# EAGLE board 3i v5 (EAGLE 9.7.0)
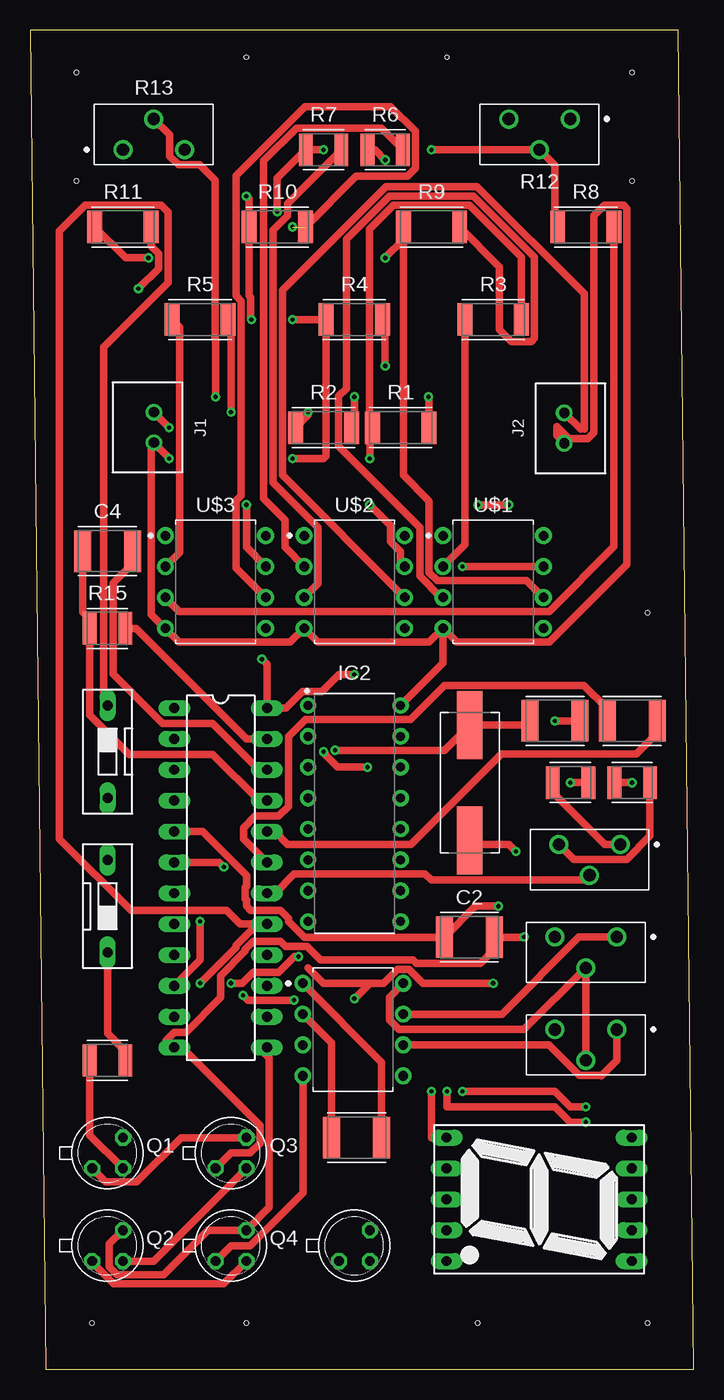
[diagram p0: board, top side]
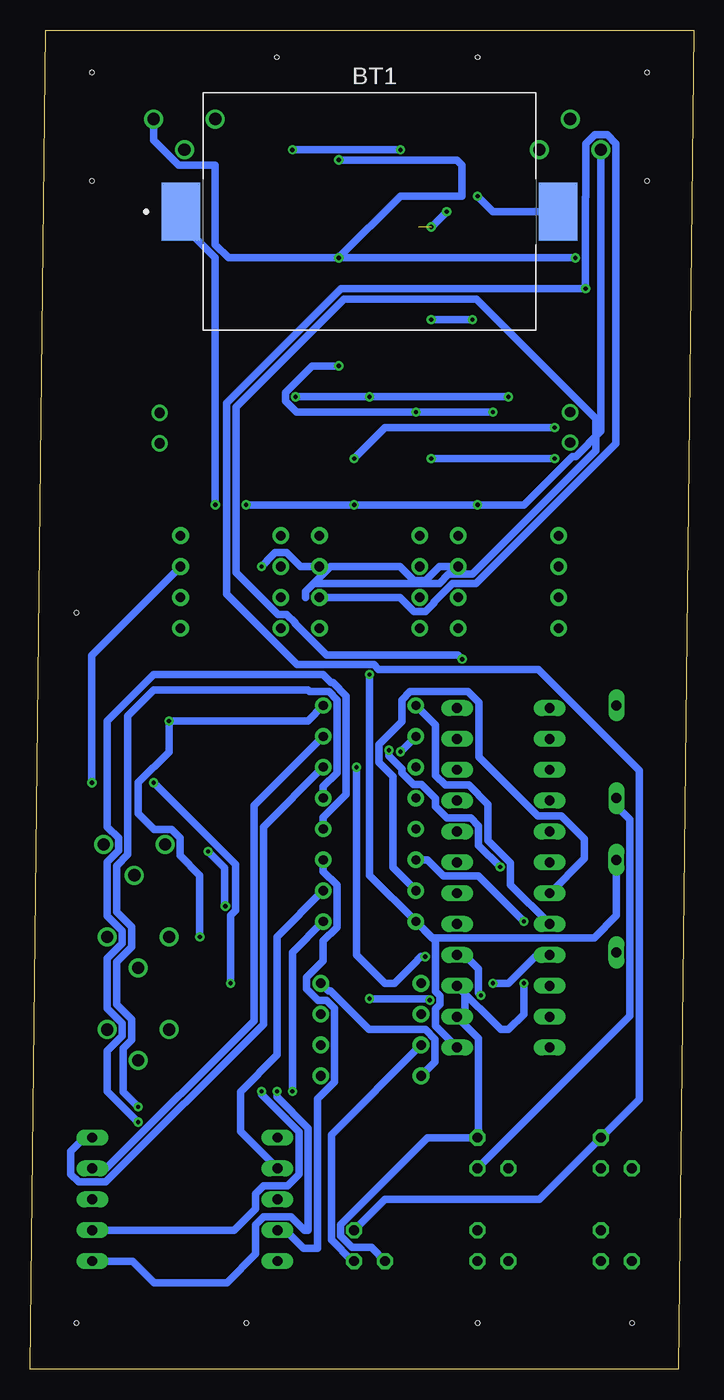
[diagram p1: board, bottom side, seen from below]

Size 54.59 x 110.16 mm. Coordinates in mm from the lower left corner, seen from the top.
Outline: 1.27,0 54.59,0 53.32,110.16 0,110.16 1.27,0
Copper layers (1*16): Top / Bottom
Stack-up Default Layer Stack: Top User Defined 0.035mm / Dielectric-1 User Defined 1.5mm / Bottom User Defined 0.035mm
Design rules: minimum copper width 6mil, minimum drill size 0.35mm, copper clearance wire_polygon to wire_polygon 6mil, copper clearance wire_polygon to pad_smd 6mil, copper clearance wire_polygon to via 6mil, copper clearance pad_smd to pad_smd 6mil, copper clearance pad_smd to via 6mil, copper clearance via to via 6mil, copper clearance smd to pad (same net) 6mil, copper clearance smd to via (same net) 6mil, copper clearance smd to smd (same net) 6mil, dimension clearance 40mil, via restrict clearance 0mil, restrict clearance 0mil, drill distance 6mil, keepout clearance 0mil
Holes 0.35 mm at 5.08,3.81 50.8,3.81 17.78,3.81 36.83,3.81 50.8,62.23 3.81,106.68 49.53,106.68 49.53,97.79 3.81,97.79 17.78,107.95 34.29,107.95

## Footprints (pad centres in the part's own frame; a part is rotated, then mirrored left to right if it is on the bottom)
796136-1 = smd 3.15 x 4.78: N 15.52,0; P -15.52,0
CAPC4532X135 = smd 1.397 x 3.415: 1 -2.057,0; 2 2.057,0
7SEG-13 = drill 0.813 long: 1 -5.08,-7.62; 2 -2.54,-7.62; 3 0,-7.62; 4 2.54,-7.62; 5 5.08,-7.62; 6 5.08,7.62; 7 2.54,7.62; 8 0,7.62; 9 -2.54,7.62; 10 -5.08,7.62
DIL24-3 = drill 0.813 long: 1 -13.97,-3.81; 2 -11.43,-3.81; 3 -8.89,-3.81; 4 -6.35,-3.81; 5 -3.81,-3.81; 6 -1.27,-3.81; 7 1.27,-3.81; 8 3.81,-3.81; 9 6.35,-3.81; 10 8.89,-3.81; 11 11.43,-3.81; 12 13.97,-3.81; 13 13.97,3.81; 14 11.43,3.81; 15 8.89,3.81; 16 6.35,3.81; 17 3.81,3.81; 18 1.27,3.81; 19 -1.27,3.81; 20 -3.81,3.81; 21 -6.35,3.81; 22 -8.89,3.81; 23 -11.43,3.81; 24 -13.97,3.81
DIP762W53P254L1969H508Q16B = drill 0.743 pad 1.343: 1 -3.81,8.89; 2 -3.81,6.35; 3 -3.81,3.81; 4 -3.81,1.27; 5 -3.81,-1.27; 6 -3.81,-3.81; 7 -3.81,-6.35; 8 -3.81,-8.89; 9 3.81,-8.89; 10 3.81,-6.35; 11 3.81,-3.81; 12 3.81,-1.27; 13 3.81,1.27; 14 3.81,3.81; 15 3.81,6.35; 16 3.81,8.89
DIP826W53P254L959H508Q8B = drill 0.786 pad 1.386: 1 -4.13,3.81; 2 -4.13,1.27; 3 -4.13,-1.27; 4 -4.13,-3.81; 5 4.13,-3.81; 6 4.13,-1.27; 7 4.13,1.27; 8 4.13,3.81
B2B-XH-A = drill 0.84: 1 0,0; 2 2.5,0
TO18 = drill 0.813 octagon: 1 -1.27,-1.27; 2 1.27,-1.27; 3 1.27,1.27
RESC5025X71 = smd 1.231 x 2.67: 1 -2.32,0; 2 2.32,0
RESC3224X71 = smd 1.131 x 2.66: 1 -1.47,0; 2 1.47,0
PV36Z = drill 1 pad 1.564: 1 0,0; 2 2.54,2.54; 3 5.08,0
DS-01 = drill 0.813 long: 1 0,-3.81; 2 0,3.81
XTAL1147X477X420N = smd 5.6 x 2.1: 1 -4.75,0; 2 4.75,0

## Placement (x,y rotation side)
BT1  796136-1  [796136-1]  26.67,95.25 0 bottom
C1  [CAPC4532X135]  49.53,53.34 0 top
C2  [CAPC4532X135]  36.14,35.54 0 top
C3  [CAPC4532X135]  43.18,53.34 0 top
C4  [CAPC4532X135]  6.35,67.31 0 top
C5  [CAPC4532X135]  26.86,19.05 0 top
DS1  7SEG-CK  [7SEG-13]  41.88,13.97 270 top
IC1  MAX132  [DIL24-3]  15.66,40.43 270 top
IC2  CD4511  [DIP762W53P254L1969H508Q16B]  26.67,45.72 0 top
IC3  IC-555  [DIP826W53P254L959H508Q8B]  26.56,27.94 0 top
J1  JST-XH-2PIN  [B2B-XH-A]  10.16,78.74 270 top
J2  JST-XH-2PIN  [B2B-XH-A]  43.95,76.18 90 top
Q1  NPN  [TO18]  6.35,17.78 0 top
Q2  NPN  [TO18]  6.35,10.16 0 top
Q3  NPN  [TO18]  16.51,17.78 0 top
Q4  NPN  [TO18]  16.51,10.16 0 top
Q5  NPN  [TO18]  26.67,10.16 0 top
R1  [RESC5025X71]  30.48,77.47 0 top
R2  [RESC5025X71]  24.13,77.47 0 top
R3  [RESC5025X71]  38.1,86.36 0 top
R4  [RESC5025X71]  26.67,86.36 0 top
R5  [RESC5025X71]  13.97,86.36 0 top
R6  [RESC3224X71]  29.21,100.33 0 top
R7  [RESC3224X71]  24.13,100.33 0 top
R8  [RESC5025X71]  45.72,93.98 0 top
R9  [RESC5025X71]  33.02,93.98 0 top
R10  [RESC5025X71]  20.32,93.98 0 top
R11  [RESC5025X71]  7.62,93.98 0 top
R12  [PV36Z]  44.45,102.87 180 top
R13  [PV36Z]  7.62,100.33 0 top
R14  [RESC3224X71]  44.45,48.26 0 top
R15  [RESC3224X71]  6.35,60.96 0 top
R16  [RESC3224X71]  49.53,48.26 0 top
R17  [PV36Z]  48.57,43.18 180 top
R18  [RESC3224X71]  6.35,25.4 0 top
R19  [PV36Z]  48.26,27.94 180 top
R20  [PV36Z]  48.26,35.56 180 top
S1  DS-01  [DS-01]  6.35,38.1 0 top
S2  DS-01  [DS-01]  6.35,50.8 180 top
U$1  OPAMP_DIP  [DIP826W53P254L959H508Q8B]  38.1,64.77 0 top
U$2  OPAMP_DIP  [DIP826W53P254L959H508Q8B]  26.67,64.77 0 top
U$3  OPAMP_DIP  [DIP826W53P254L959H508Q8B]  15.24,64.77 0 top
XTAL1  16MHz  [XTAL1147X477X420N]  36.16,48.26 90 top

## Library data of the parts
BT1 = Battery_Holder; CATEGORY: Battery-Holder; MANUFACTURER: TE Connectivity AMP Connectors; MPN: 796136-1; PART_STATUS: ACTIVE; ROHS_COMPLIANCE: Compliant; SERIES: 2032; SUB_CATEGORY: Holder; TYPE: Coin Cell
C1-C5 = Tutorial - Fusion 360; CATEGORY: Capacitor
DS1 = Opto-Electronic; CATEGORY: Opto-Electronic; SUB-CATEGORY: Display; TYPE: 7-Segment
IC1 = IC_Data-Conversion; CATEGORY: IC_Data-Conversion; DESCRIPTION: IC ADC 18BIT MULTI-SLOPE 24DIP; MANUFACTURER: Maxim Integrated; MPN: MAX132ENG; OPERATING_TEMP: -40°C to 85°C; PART_STATUS: Active; ROHS_COMPLIANT: RoHS3 Compliant; SERIES: MAX132; SUB-CATEGORY: A/D Converter
IC2 = IC_Logic; CATEGORY: IC_Logic; DESCRIPTION: BCD to 7-segment Latch; MANUFACTURER: Generic; MPN: Generic; SUB-CATEGORY: Latch; TYPE: BCD to 7-seg
IC3 = IC_Clock-Timing; CATEGORY: IC_Clock-Timing; CURRENT-SUPPLY: 60µA; DESCRIPTION: IC OSC SINGLE TIMER 1MHZ 8DIP; FREQUENCY: 1MHz; MANUFACTURER: Renesas Electronics America Inc; MPN: ICM7555IPAZ; OPERATING_TEMP: -25°C to 85°C; PART_STATUS: Active; ROHS_COMPLIANT: ROHS3 Compliant; SUB-CATEGORY: Timer
J1 J2 = Connector; CATEGORY: Header; DESCRIPTION: Connector Header Through Hole 2 position 0.098" (2.50mm); MANUFACTURER: JST Sales America Inc.; MPN: B2B-XH-A(LF)(SN); OPERATING_TEMPERATURE: -25°C ~ 85°C; PART_STATUS: ACTIVE; PITCH: 0.098" (2.50mm); ROHS_COMPLIANCE: ROHS3 Compliant; SERIES: XH; SUB_CATEGORY: Rectangular Connectors; TYPE: Header, Male Pin, Board to Cable/Wire, Through Hole
Q1-Q5 = Transistor; CATEGORY: Transistor; SUB-CATEGORY: BJT; TYPE: NPN
R1-R5 R8-R11 = Resistor; CATEGORY: Resistor; SUB-CATEGORY: Fixed
R6 R7 R14-R16 R18 = Tutorial - Fusion 360; CATEGORY: Resistor; SUB-CATEGORY: Fixed
R12 R13 R17 R19 R20 = Resistor; CATEGORY: Resistor; DESCRIPTION: Lead Sealed Type Multiturn PV36 Series; MANUFACTURER: BOURNS; MPN: PV36Z; OPERATING_TEMPERATURE: -55 to +125 °C; PART_STATUS: Active; ROHS_COMPLIANCE: RoHS Compliant; SERIES: PV36; SUB-CATEGORY: Trimpot; TYPE: Lead Sealed
S1 S2 = Switch; CATEGORY: SWITCH; TYPE: SPST
U$1-U$3 = Tinkercad
XTAL1 = Frequency-Source; CATEGORY: HC/49US (AT49) SMD LOW PROFILE CRYSTAL; DESCRIPTION: Crystal 16MHZ SMD 11.5 x 4.7 x 4.2 mm; FREQUENCY: 16MHZ; MANUFACTURER: ABRACON; MPN: ABLS-16.000MHZ-S-R500MD2XF; OPERATING_TEMPERATURE: -40°C ~ +85°C; PART_STATUS: ACTIVE; ROHS_COMPLIANT: COMPLIANT; SERIES: ABLS; SUB_CATEGORY: Crystal; TOLERANCE: 20PPM; TYPE: Low Profile Crystal

## Nets
N$1: R1.2 R2.2 R13.2
N$2: R2.1 R4.2 R5.2
N$3: C1.1 IC1.19
N$4: J1.1 R1.1 R3.2
N$5: R3.1 U$1.2
N$6: R5.1 U$3.2
N$7: R6.2 U$2.2
N$8: R7.2 U$2.3
N$9: R6.1 R9.1 R11.1 R12.1 U$1.6
N$10: R7.1 R8.1 R10.2 R12.2 U$3.6
N$11: R9.2 U$1.3
N$12: R8.2 U$3.3
N$13: J2.2 Q1.3 Q5.3 R11.2 U$2.6
N$14: BT1.N C2.2 C3.2 IC1.12 IC2.16 J1.2 J2.1 Q3.1 R4.1 R10.1 U$1.4 U$2.4 U$3.4
N$15: BT1.P IC1.13 IC1.24 IC2.8 Q2.3 Q4.3 R13.1 R16.1 S1.2 U$1.7 U$2.7 U$3.7
N$16: C1.2 IC1.20
N$17: IC1.7 IC2.7
N$18: IC1.8 IC2.1
N$19: IC1.9 IC2.2
N$20: IC1.10 IC2.6
N$21: C3.1 IC1.6 XTAL1.2
N$22: C2.1 IC1.5 XTAL1.1
N$23: R14.1 R17.1
N$24: R16.2 R17.3
N$25: IC1.16 R14.2
N$26: IC1.18 R17.2
N$27: IC1.23 R15.2
N$28: C4.2 IC1.22
N$29: C4.1 IC1.21 R15.1
N$30: DS1.1 IC2.9
N$31: DS1.2 IC2.10
N$32: DS1.4 IC2.11
N$33: DS1.6 IC2.12
N$34: DS1.7 IC2.13
N$35: DS1.9 IC2.15
N$36: DS1.10 IC2.14
N$37: Q2.1 Q4.2
N$38: Q1.2 R18.1
N$39: R18.2 S1.1
N$40: Q2.2 Q3.2 S2.2
N$41: IC3.4 IC3.8 Q4.1 R19.2 R20.2
N$42: IC1.14 IC1.15 IC1.17 Q1.1 Q3.3 Q5.1 S2.1
N$43: C5.1 IC3.2
N$44: C5.2 IC3.1
N$45: IC3.6 R19.1
N$46: IC3.7 R20.1
N$47: IC3.3 Q5.2

## Tracks (layer width: path | path; a pad name or v marks a point on that pad's centre or on a via)
N$1  (via drill 0.35)
  Top 0.61: v15.24,80.01 15.24,84.81 15.22,84.84 15.22,97.81 13.94,99.09 12.19,99.09 11.46,99.82 11.46,101.57 R13.2 | v26.67,80.01 26.67,77.69 R2.2 | v32.76,80.01 32.8,79.97 R1.2
  Bottom 0.61: v15.24,80.01 v26.67,80.01 v32.76,80.01
N$2  (via drill 0.35)
  Top 0.61: R4.2 29.21,86.14 v29.21,82.55 | R2.1 22.86,78.52 v22.86,78.74 | R5.2 16.51,86.14 v16.51,78.74
  Bottom 0.61: v29.21,82.55 31.4,82.55 33.6,80.36 33.6,79.66 32.67,78.74 v22.86,78.74 v16.51,78.74
N$3
  Top 0.61: C1.1 47.47,54.35 45.55,56.27 34.09,56.27 31.28,53.45 22.65,53.45 21.25,52.05 21.25,46.32 20.44,45.51 18.5,45.51 17.54,44.55 17.54,43.63 IC1.19
N$4  (via drill 0.35)
  Top 0.61: R3.2 40.42,91.5 36.14,95.77 29.9,95.77 27.92,93.79 27.92,77.71 27.94,77.69 | 27.94,77.69 R1.1 | v11.43,77.47 J1.1 | 27.94,77.69 v27.94,74.93
  Bottom 0.61: v11.43,77.47 25.4,77.47 v27.94,74.93
N$5
  Top 0.61: R3.1 35.78,67.85 U$1.2
N$6
  Top 0.61: U$3.2 12.27,67.19 12.27,85.75 R5.1
N$7
  Top 0.61: R6.2 28.89,102.12 21.91,102.12 19.21,99.42 19.21,71.62 20.95,69.88 20.95,67.62 U$2.2
N$8
  Top 0.61: U$2.3 23.69,64.65 23.69,69.25 19.98,72.96 19.98,93.72 21.16,94.9 21.16,95.89 R7.2
N$9  (via drill 0.35)
  Top 0.61: U$1.6 40.84,64.89 33.49,64.89 32.82,65.56 32.82,71.43 30.7,73.55 R9.1 30.7,92.93 v29.21,91.44 | R11.1 7.84,91.44 v9.72,91.44 | R6.1 28.38,100.33 v29.21,99.5
  Bottom 0.61: v29.21,91.44 38.29,91.44 39.37,92.52 39.37,97.79 39.37,99.06 42.39,99.06 44.45,101.12 R12.1 | v29.21,91.44 24.13,96.52 19.05,96.52 19.05,99.06 19.48,99.5 v29.21,99.5 | v29.21,91.44 v9.72,91.44
N$10  (via drill 0.35)  (1 unrouted)
  Top 0.61: R10.2 26.81,98.15 31.04,98.15 31.7,98.81 31.7,101.85 29.66,103.89 22.61,103.89 16.93,98.22 16.93,88.32 17.36,87.88 17.36,71.88 16.95,71.47 16.95,65.92 U$3.6 | R8.1 43.18,94.2 43.18,99.06 R12.2 v33.02,100.33 | v24.13,100.33 R7.1 20.32,97.99 v20.32,95.25
  Bottom 0.61: v33.02,100.33 v24.13,100.33 | v20.32,95.25 v21.59,93.98
N$11
  Top 0.61: R9.2 38.63,90.69 38.63,85.56 39.62,84.57 41.22,84.57 41.49,84.84 41.49,91.5 36.46,96.53 29.58,96.53 26.02,92.97 26.02,80.69 25.38,80.05 25.38,75.95 32.06,69.26 32.06,65.25 33.81,63.5 U$1.3
N$12
  Top 0.61: R8.2 48.04,67.68 42.71,62.35 12.26,62.35 U$3.3
N$13  (via drill 0.35)
  Top 0.152: 45.3,77.33 45.58,77.33
  Top 0.61: 45.58,77.33 45.58,88.49 36.78,97.3 29.26,97.3 20.74,88.77 20.74,73.56 U$2.6 | R11.2 9.94,92.41 10.56,91.79 10.56,90.57 v8.89,88.9 | J2.2 45.3,77.33
  Bottom 0.61: U$2.6 24.17,63.5 23.02,62.35 22.06,62.35 21.39,63.02 21.39,63.11 19.85,64.65 17.9,64.65 6.38,76.17 6.38,100.84 7.11,101.57 8.13,101.57 8.86,100.84 8.86,96.46 8.89,96.43 v8.89,88.9 29.02,88.9 38.42,79.5 38.42,63.79 32.62,57.98 26.32,57.98 25.92,57.59 12.79,57.59 4.47,49.26 4.47,22.2 Q1.3 12.7,13.97 25.4,13.97 Q5.3
N$14  (via drill 0.35)
  Top 0.61: U$1.4 35.12,59.81 42.71,59.81 49.11,66.22 49.11,95.5 48.84,95.77 47.23,95.77 46.38,94.91 46.38,77.05 45.9,76.57 44.32,76.57 43.32,77.57 43.32,76.81 J2.1 | U$1.4 32.82,59.81 23.69,59.81 U$2.4 21.39,59.81 12.26,59.81 U$3.4 9.96,62.11 9.96,76.04 J1.2 11.43,74.97 v11.43,74.93 | v21.59,74.93 24.13,74.93 24.35,75.15 R4.1 v21.59,86.36 | v17.78,96.52 18,96.3 R10.1 18,88.32 18.12,88.2 18.12,86.36 v18.2,86.36 | Q3.1 16.51,17.78 18.09,17.78 18.9,18.59 18.9,20.07 12.51,26.46 IC1.12 11.19,26.46 11.19,27.07 11.85,27.73 12.82,27.73 15.66,30.57 15.66,32.36 17.69,34.39 17.69,34.54 18.34,35.2 20.59,35.2 21.01,34.78 22.77,34.78 23.89,33.66 31.48,33.66 31.77,33.38 37.04,33.38 38.2,34.53 C2.2 40.62,35.54 v40.64,35.56 | U$1.4 33.97,58.1 IC2.16 | C3.2 v43.18,53.34
  Bottom 0.61: v11.43,74.93 v21.59,74.93 | BT1.N 16.51,95.25 v17.78,96.52 | v18.2,86.36 v21.59,86.36 | IC2.16 31.75,53.34 v43.18,53.34 43.18,50.8 45.72,48.26 45.72,45.72 44.42,44.42 42.98,44.42 42.25,43.69 42.25,42.25 40.64,40.64 v40.64,35.56
N$15  (via drill 0.35)
  Top 0.61: U$3.7 17.78,67.63 v17.78,71.12 | v27.94,71.12 29.65,69.41 29.65,68.1 30.48,67.27 30.48,66.04 U$2.7 | Q2.3 6.5,10.31 6.5,8.43 7.16,7.77 10.97,7.77 14.63,11.43 Q4.3 19.66,13.31 19.66,25.61 18.81,26.46 IC1.13 | v19.05,58.42 19.47,58 IC1.24 21.05,54.4 22.39,55.74 23.99,55.74 25.4,57.15 v26.67,57.15 | v49.53,48.26 R16.1 | U$1.7 v35.56,66.04 | v36.83,71.12 v39.37,71.12
  Bottom 0.61: R13.1 7.62,77.18 9.69,75.11 9.98,75.11 13.97,71.12 v17.78,71.12 v27.94,71.12 v36.83,71.12 | IC2.8 21.53,35.5 8.19,35.5 6.35,37.34 S1.2 | IC2.8 21.25,35.22 21.25,31.08 20.88,30.7 20.88,30.01 21.25,29.64 21.25,28.24 IC1.13 | U$3.7 20.91,66.04 22.06,64.89 23.02,64.89 24.17,66.04 29.89,66.04 31.28,64.65 | 31.95,63.5 31.95,63.98 31.28,64.65 | 31.28,64.65 20.92,64.65 20.16,65.41 18.21,65.41 8.05,75.57 8.05,78.23 17.89,88.06 28.77,88.06 37.66,79.18 37.66,65.56 34.21,62.11 33.49,62.11 32.82,61.44 32.82,61.35 30.21,58.75 19.38,58.75 v19.05,58.42 | v26.67,57.15 26.67,40.64 IC2.8 | U$1.7 49.53,58.74 v49.53,48.26 | v35.56,66.04 35.12,66.48 35.12,66.52 34.45,67.19 33.49,67.19 32.34,66.04 U$2.7 | v39.37,71.12 39.37,91.44 42.19,94.26 BT1.P
N$16
  Top 0.61: C1.2 51.59,52.33 49.87,50.61 38.77,50.61 31.34,43.18 21.19,43.18 20.13,44.24 IC1.20
N$17
  Bottom 0.61: IC1.7 8.99,42.01 8.99,43.63 10.88,45.51 12.82,45.51 17.66,50.35 17.66,54.83 18.57,55.74 23.33,55.74 23.99,55.08 23.99,53.3 25.91,51.38 25.91,49.9 24.75,48.75 24.75,41.26 IC2.7
N$18
  Bottom 0.61: IC2.1 21.25,53 21.25,48.86 20.44,48.05 18.5,48.05 16.93,46.48 16.93,43.51 15.08,41.66 15.08,39.85 IC1.8
N$19  (via drill 0.35)
  Top 0.61: v16.51,31.75 17.44,31.75 18.34,32.66 20.45,32.66 21.73,33.94 v22.08,33.94 | v24.13,50.8 24.24,50.69 24.24,50.57 25.28,49.53 v27.75,49.53
  Bottom 0.61: IC2.2 v24.13,50.8 | v16.51,31.75 15.24,31.75 12.7,34.29 12.06,34.29 IC1.9 | v22.08,33.94 22.43,33.94 23.11,33.27 24.62,31.75 25.4,31.75 27.75,34.1 v27.75,49.53
N$20  (via drill 0.35)
  Top 0.61: IC1.10 13.97,33.66 v13.97,36.83
  Bottom 0.61: v13.97,36.83 17.72,40.58 20.59,40.58 21.92,41.91 IC2.6
N$21  (via drill 0.35)
  Top 0.61: C3.1 40.79,53.01 XTAL1.2 34.07,50.92 v25.07,50.92 | IC1.6 15.54,41.7 v15.92,41.32
  Bottom 0.61: v15.92,41.32 17.69,43.09 17.69,44.7 18.34,45.36 20.29,45.36 21.25,46.32 21.25,46.97 22.39,48.12 23.05,48.12 23.99,49.06 23.99,49.39 25.07,50.47 v25.07,50.92
N$22  (via drill 0.35)
  Top 0.61: IC1.5 14.18,44.24 17.78,40.64 17.78,39.71 17.69,39.62 17.69,38.7 17.78,38.61 17.78,38.1 18.14,37.74 20.59,37.74 21.25,37.08 21.25,36.85 22.55,35.54 C2.1 36.65,38.1 v38.53,38.1 | XTAL1.1 36.49,43.18 39.37,43.18 v39.96,42.59
  Bottom 0.61: v38.53,38.1 38.61,38.17 38.61,41.24 v39.96,42.59
N$23
  Top 0.61: R17.1 47.3,43.18 42.98,47.5 R14.1
N$24
  Top 0.61: R16.2 51,43.86 49.08,41.94 44.73,41.94 R17.3
N$25  (via drill 0.35)
  Top 0.61: v44.45,48.26 R14.2 | 22.86,33.02 24.13,31.75 27.94,31.75 | v38.1,31.75 32.32,31.75 31.17,32.9 30.21,32.9 29.06,31.75 27.94,31.75 | 27.94,31.75 v26.67,30.48 | v21.71,30.36 17.9,30.36 v17.5,30.76
  Bottom 0.61: v26.67,30.48 21.73,30.48 21.66,30.41 v21.71,30.36 | IC1.16 19.26,34.29 19.05,34.29 17.69,32.93 17.69,30.94 v17.5,30.76 | v38.1,31.75 38.1,37.35 37.7,37.75 37.7,41.51 v44.45,48.26
N$26
  Top 0.61: R17.2 45.64,40.25 33,40.25 32.5,40.75 21.72,40.75 20.13,39.16 IC1.18
N$27
  Top 0.61: IC1.23 17.79,51.86 8.69,60.96 R15.2
N$28
  Top 0.61: C4.2 8.41,66.3 6.8,64.69 6.8,57.21 10.88,53.13 15,53.13 18.81,49.32 IC1.22
N$29
  Top 0.61: IC1.21 18.81,46.78 15,50.59 8.13,50.59 4.88,53.84 R15.1 4.88,61.72 4.29,62.31 C4.1
N$30  (via drill 0.35)
  Top 0.61: 33.02,19.05 v33.02,22.86 | 33.02,19.05 | DS1.1 33.02,19.05
  Bottom 0.61: IC2.9 33.02,34.29 v33.02,22.86
N$31
  Bottom 0.61: IC2.10 34.27,35.58 34.27,25.86 37.31,22.83 37.31,19.56 DS1.2
N$32
  Bottom 0.61: IC2.11 30.48,40.97 29.35,39.84 29.35,36.36 30.48,35.23 30.48,33.59 31.84,32.23 31.84,31.27 30.93,30.36 30.21,30.36 29.54,29.69 29.54,23.65 30.96,22.24 30.96,9.95 32.12,9.95 33.6,11.43 DS1.4
N$33  (via drill 0.35)
  Top 0.61: v45.72,20.32 44.45,20.32 43.18,21.59 34.29,21.59 v34.29,22.86
  Bottom 0.61: DS1.6 46.18,8.89 44.4,7.11 38.42,7.11 36.04,9.49 36.04,11.89 35.38,12.55 33.13,12.55 32.02,11.43 31.72,11.43 31.72,19.83 34.29,22.4 v34.29,22.86 | IC2.12 30.48,45.39 28.59,47.28 28.59,55.39 29.7,56.5 29.83,56.5 30.48,57.15 44.45,57.15 48.26,53.34 48.26,44.62 47.33,43.69 47.33,42.67 48.26,41.74 48.26,37.31 47.02,36.07 47.02,35.05 48.26,33.81 48.26,29.69 47.02,28.45 47.02,27.43 48.26,26.19 48.26,22.86 v45.72,20.32
N$34  (via drill 0.35)
  Top 0.61: v45.72,21.59 44.45,21.59 43.18,22.86 v35.56,22.86
  Bottom 0.61: DS1.7 37.81,11.43 36.04,13.21 36.04,14.43 35.38,15.09 33.44,15.09 32.48,16.05 32.48,19.51 35.56,22.59 v35.56,22.86 | IC2.13 30.48,47.93 29.35,49.06 29.35,55.08 30.01,55.74 31.61,55.74 31.75,55.88 44.45,55.88 46.57,53.76 46.57,42.35 47.5,41.42 47.5,37.63 46.26,36.39 46.26,34.73 47.5,33.49 47.5,30.01 46.26,28.77 46.26,27.11 46.96,26.41 46.96,22.83 v45.72,21.59
N$35
  Bottom 0.61: IC2.15 36.19,46.36 36.19,28.67 48.35,16.51 DS1.9
N$36
  Bottom 0.61: IC2.14 35.38,44.63 35.38,28.39 48.38,15.39 50.62,15.39 51.28,16.05 51.28,17.93 50.16,19.05 DS1.10
N$37
  Top 0.61: Q2.1 5.08,8.77 6.84,7.01 15.9,7.01 Q4.2
N$38
  Top 0.61: Q1.2 4.88,19.25 R18.1
N$39
  Top 0.61: R18.2 7.82,26.16 6.35,27.63 6.35,33.63 S1.1
N$40
  Top 0.61: Q2.2 10.16,8.89 Q3.2
  Bottom 0.61: Q3.2 5.23,29.06 5.23,45.21 6.35,46.33 S2.2
N$41
  Top 0.61: R19.2 R20.2 40.64,27.94 30.33,27.94 29.54,28.73 29.54,30.6 IC3.8 | Q4.1 16.51,10.16 18.09,10.16 22.43,14.5 IC3.4
  Bottom 0.61: IC3.4 21.28,25.28 21.28,27.15 22.07,27.94 26.71,27.94 29.9,31.12 30.06,31.12 IC3.8
N$42  (via drill 0.35)
  Top 0.61: Q1.1 6.2,15.39 8.77,15.39 12.43,19.05 Q3.3 | 18.69,36.62 17.26,36.62 16.14,37.74 8.28,37.74 2.38,43.64 2.38,93.65 4.5,95.77 10.74,95.77 11.32,95.19 11.32,89.4 6.04,84.11 6.04,55.59 6.35,55.27 S2.1 | IC1.17 19.05,36.62 18.69,36.62 | v13.97,31.75 16.93,34.71 16.93,34.86 18.69,36.62
  Bottom 0.61: Q5.1 26.52,10.01 28.1,10.01 29.06,10.97 29.06,11.89 21.9,19.05 Q3.3 17.69,19.14 17.69,27.22 IC1.14 18.81,29 18.81,31.54 IC1.15 15.87,27.94 15.24,27.94 13.97,29.21 v13.97,31.75
N$43
  Top 0.61: C5.1 24.81,26.83 IC3.2
N$44
  Top 0.61: C5.2 28.92,25.26 IC3.1
N$45
  Top 0.61: IC3.6 42.7,26.67 45.21,24.16 46.96,24.16 46.99,24.13 48.26,25.4 R19.1
N$46
  Top 0.61: R20.1 45.17,35.56 38.82,29.21 IC3.7
N$47
  Bottom 0.61: Q5.2 28.06,8.89 29.82,10.65 29.82,19.28 IC3.3